# Altium PCB Cama caliente.PcbDoc
Units mm, origin at the board's own origin, x right, y up, seen from the top; angles counter-clockwise.
Board outline 200 x 200 mm, 2 copper layers (Top Layer, Bottom Layer); 1 components, 1 nets, 2 pads, 0 vias.
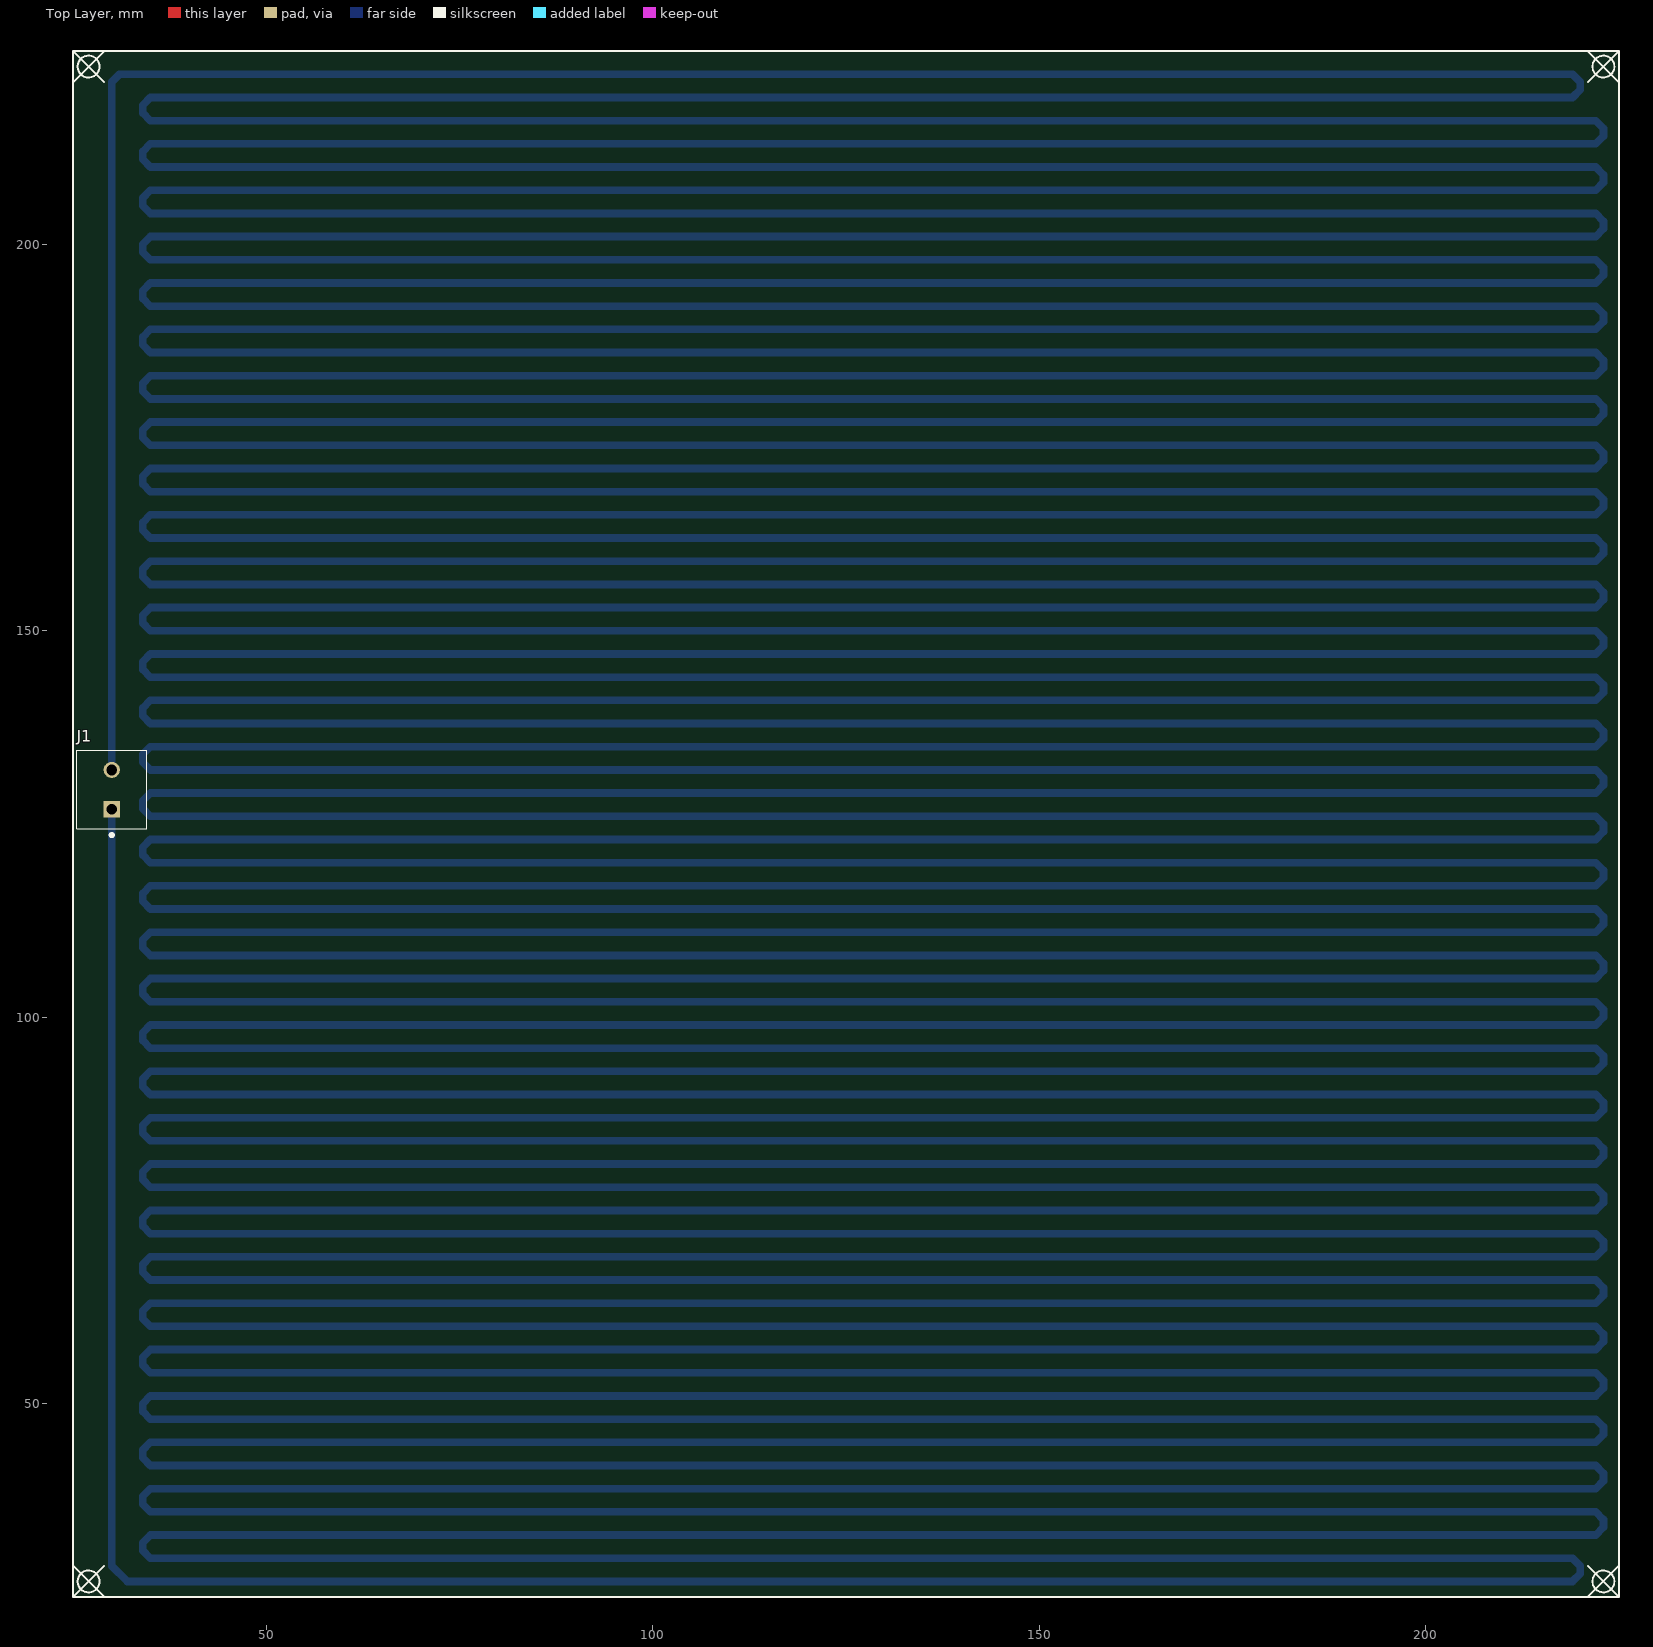
[diagram p0: Top Layer view]
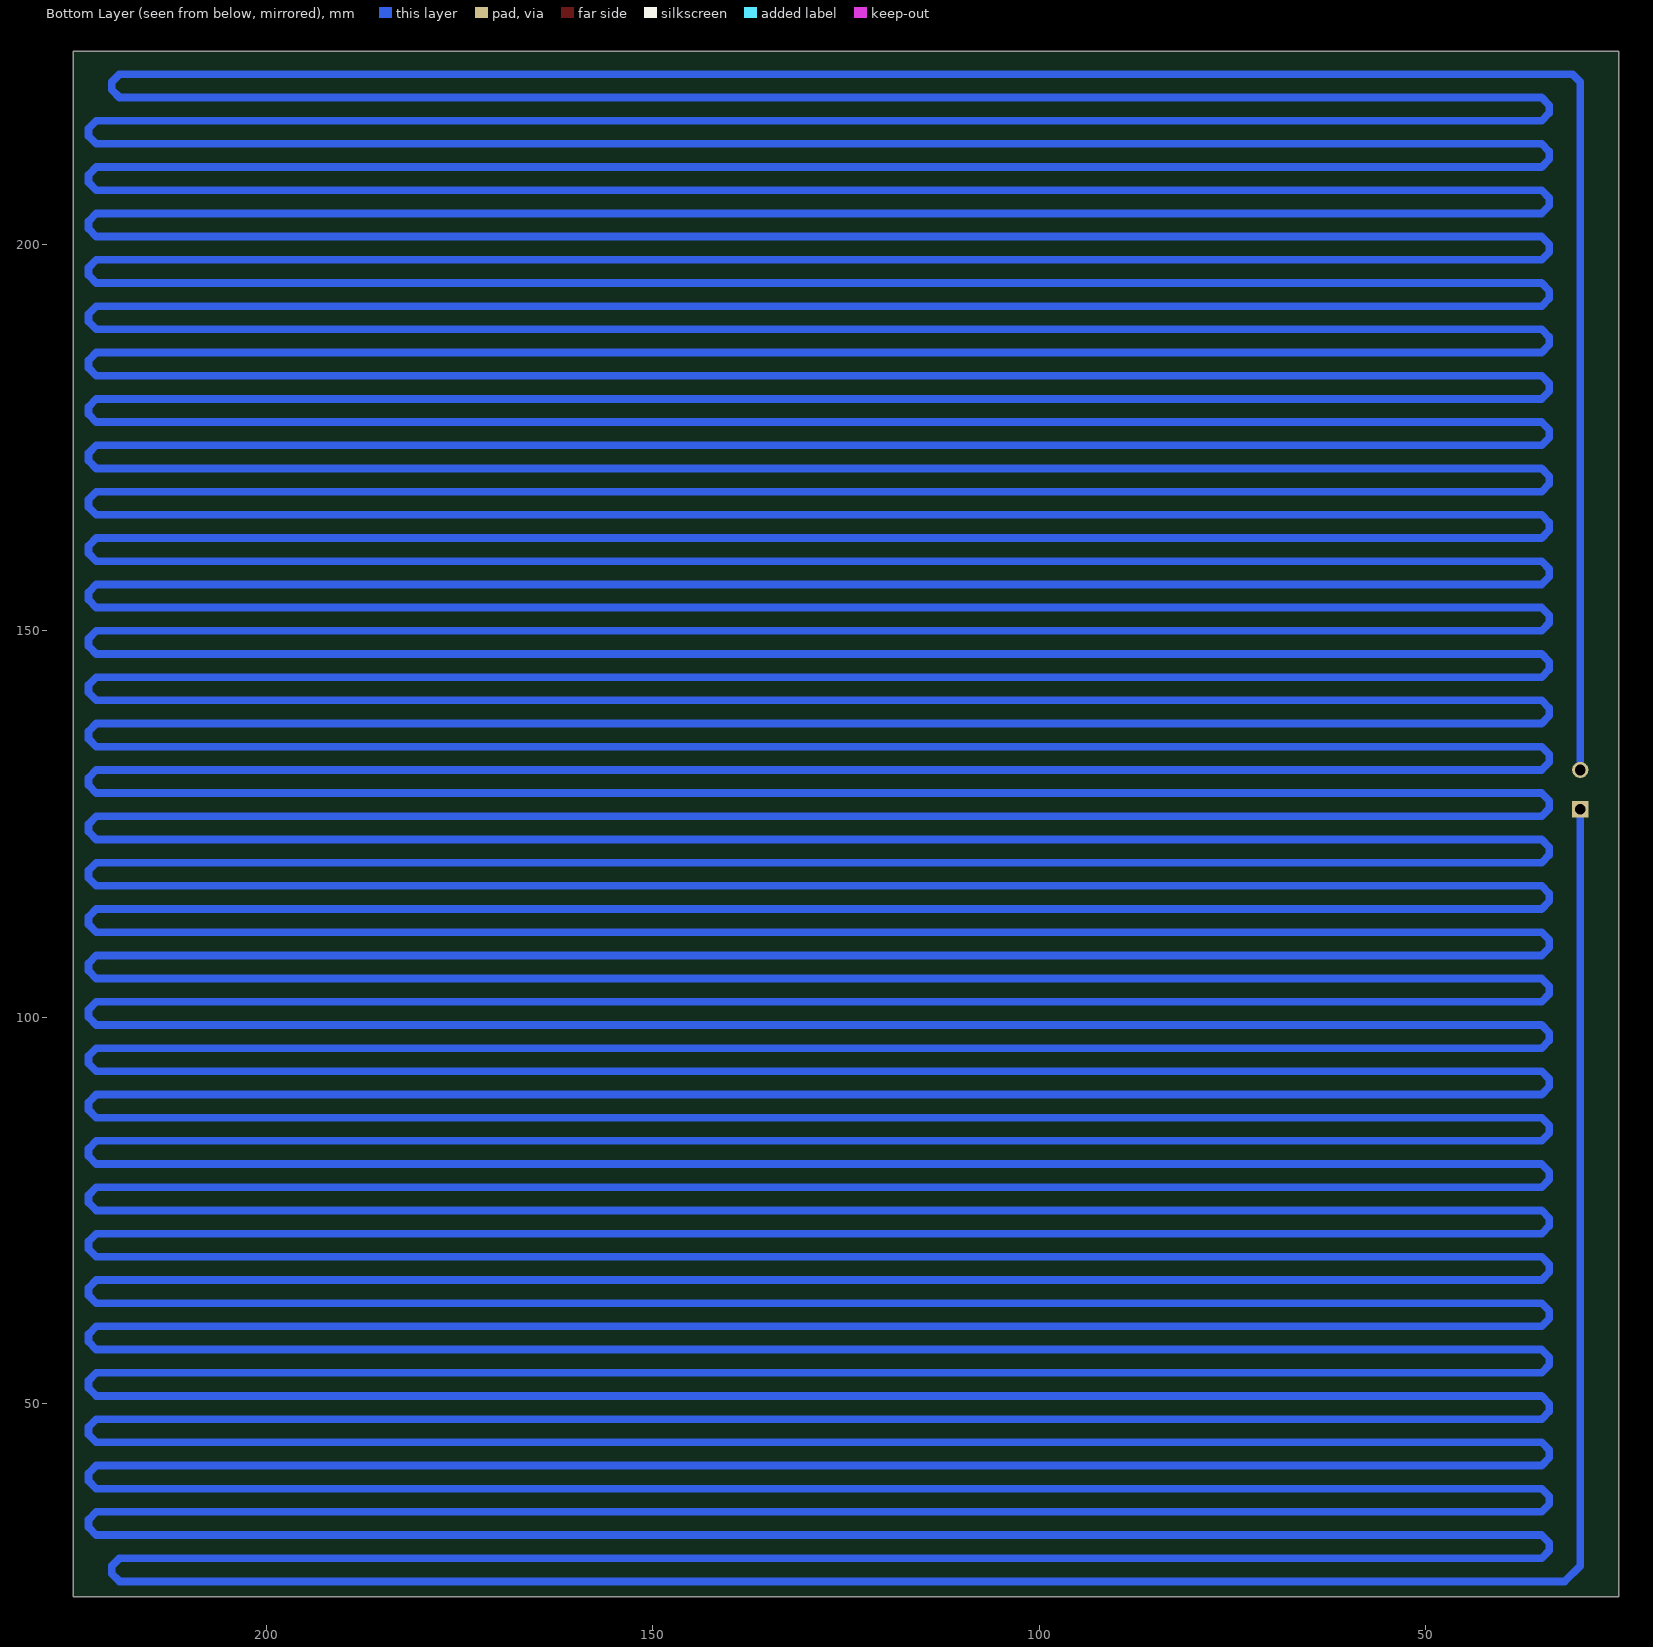
[diagram p1: Bottom Layer view, seen from below]

## Layer stack, top to bottom
Top Solder: solder mask 0.0102, Solder Resist, Dk 3.5
Top Layer: signal copper 0.0356
Dielectric 1: dielectric 0.32, FR-4, Dk 4.8
Bottom Layer: signal copper 0.0356
Bottom Solder: solder mask 0.0102, Solder Resist, Dk 3.5

## Board outline
25,25 225,25 225,225 25,225

## Design rules (kind name [scope] priority, off if disabled: settings)
Clearance [All] p1: gap=0.254 ignorepadtopadclearanceinfootprint=FALSE except(0: Arc-Hole Track-Hole SMDPad-Hole THPad-Hole Via-Hole Fill-Hole Poly-Hole Region-Hole Text-Hole)
PolygonConnect [All] p1: connectstyle=Relief reliefconductorwidth=0.254 reliefentries=4 polygonreliefangle="90 Angle" airgapwidth=0.254
RoutingVias [All] p1: holewidth=0.711 width=1.27 viastyle="Through Hole" minholewidth=0.711 minwidth=1.27 maxholewidth=0.711 maxwidth=1.27
SolderMaskExpansion [All] p1: expansion=0.102
Width [All] p1: maxlimit=1 minlimit=1 preferedwidth=1
30 further rules are at their usual default settings.

## Components (designator, comment, footprint, x,y, rotation, side; value= is the part's Value field where it differs from the comment)
J1 "282841-2" TE_282841-2 30,129.46 r90 top

## Footprints (in the part's own frame and the unit in brackets; to place one, negate y for a bottom-side part, rotate by r counter-clockwise, add the part's x,y. Pads: shape width x height; smd on the part's side, far side on the other; paste and mask are expansions set on the pad)
TE_282841-2 [mm]
  rect 2.1x2.1 hole 1.4: 1(-2.54,0)
  round 2.1 hole 1.4: 2(2.54,0)
  silkscreen extent -6.09,-4.5 5.08,4.5

## Part data
J1: "Conn Terminal Block 2 POS 5.08mm Solder ST Thru-Hole 17.5A/Contact", Package=None, Availability=Unavailable, Comment_1="Entrada y salida", EU_RoHS_Compliance="Compliant with Exemptions", MF="TE Connectivity", MP=282841-2, Price=None, SnapEDA_Link=https://www.snapeda.com/parts/282841-2/TE%20Connectivity%20AMP%20Connectors/view-part/434231/?ref=snap, TE_purchase_URL=https://www.te.com/usa-en/product-282841-2.html?te_bu=Cor&te_type=disp&te_campaign=seda_glo_cor-seda-global-disp-prtnr-fy19-seda-model-bom-cta_sma-317_1&elqCampaignId=32493

## Nets (pads, with @x,y where several pads share a name; then routed paths per layer and width w, separated by ;. In a path a pad name is that pad's centre, name@x,y a point inside that pad or via, vN(x,y) a via of type N, cw(c..) or ccw(c..) an arc to the next point about the centre after c; other vN are vias at no path point)
NetJ1_1: J1.1 J1.2 | length 12777
  Bottom Layer w1: J1.1 30,29 32,27 219,27 220,28 220,29 219,30 35,30 34,31 34,32 35,33 222,33 223,34 223,35 222,36 35,36 34,37 34,38 35,39 222,39 223,40 223,41 222,42 35,42 34,43 34,44 35,45 222,45 223,46 223,47 222,48 35,48 34,49 34,50 35,51 222,51 223,52 223,53 222,54 35,54 34,55 34,56 35,57 222,57 223,58 223,59 222,60 35,60 34,61 34,62 35,63 222,63 223,64 223,65 222,66 35,66 34,67 34,68 35,69 222,69 223,70 223,71 222,72 35,72 34,73 34,74 35,75 222,75 223,76 223,77 222,78 35,78 34,79 34,80 35,81 222,81 223,82 223,83 222,84 35,84 34,85 34,86 35,87 222,87 223,88 223,89 222,90 35,90 34,91 34,92 35,93 222,93 223,94 223,95 222,96 35,96 34,97 34,98 35,99 222,99 223,100 223,101 222,102 35,102 34,103 34,104 35,105 222,105 223,106 223,107 222,108 35,108 34,109 34,110 35,111 222,111 223,112 223,113 222,114 35,114 34,115 34,116 35,117 222,117 223,118 223,119 222,120 35,120 34,121 34,122 35,123 222,123 223,124 223,125 222,126 35,126 34,127 34,128 35,129 222,129 223,130 223,131 222,132 35,132 34,133 34,134 35,135 222,135 223,136 223,137 222,138 35,138 34,139 34,140 35,141 222,141 223,142 223,143 222,144 35,144 34,145 34,146 35,147 222,147 223,148 223,149 222,150 35,150 34,151 34,152 35,153 222,153 223,154 223,155 222,156 35,156 34,157 34,158 35,159 222,159 223,160 223,161 222,162 35,162 34,163 34,164 35,165 222,165 223,166 223,167 222,168 35,168 34,169 34,170 35,171 222,171 223,172 223,173 222,174 35,174 34,175 34,176 35,177 222,177 223,178 223,179 222,180 35,180 34,181 34,182 35,183 222,183 223,184 223,185 222,186 35,186 34,187 34,188 35,189 222,189 223,190 223,191 222,192 35,192 34,193 34,194 35,195 222,195 223,196 223,197 222,198 35,198 34,199 34,200 35,201 222,201 223,202 223,203 222,204 35,204 34,205 34,206 35,207 222,207 223,208 223,209 222,210 35,210 34,211 34,212 35,213 222,213 223,214 223,215 222,216 35,216 34,217 34,218 35,219 219,219 220,220 220,221 219,222 31,222 30,221 J1.2

## Silkscreen, mask and mechanical layers (free items; w line width, h text height)
Top Overlay:
  circle w0.254: c223,223 r1.414
  circle w0.254: c223,27 r1.414
  circle w0.254: c27,27 r1.414
  circle w0.254: c27,223 r1.414
  lines w0.254: 25,29 29,25 ; 25,221 29,225 ; 29,29 25,25 ; 29,221 25,225 ; 221,25 225,29 ; 221,29 225,25 ; 221,221 225,225 ; 221,225 225,221 ; 25,25 25,225 ; 25,25 225,25 ; 25,225 225,225 ; 225,25 225,225